# Altium PCB PCB1.pcbdoc
Units mm, origin at the board's own origin, x right, y up, seen from the top; angles counter-clockwise.
Board outline 61.2 x 73.2 mm, 4 copper layers (Top Layer, Inner1, Inner2, Bottom Layer); 32 components, 18 nets, 90 pads, 0 vias.
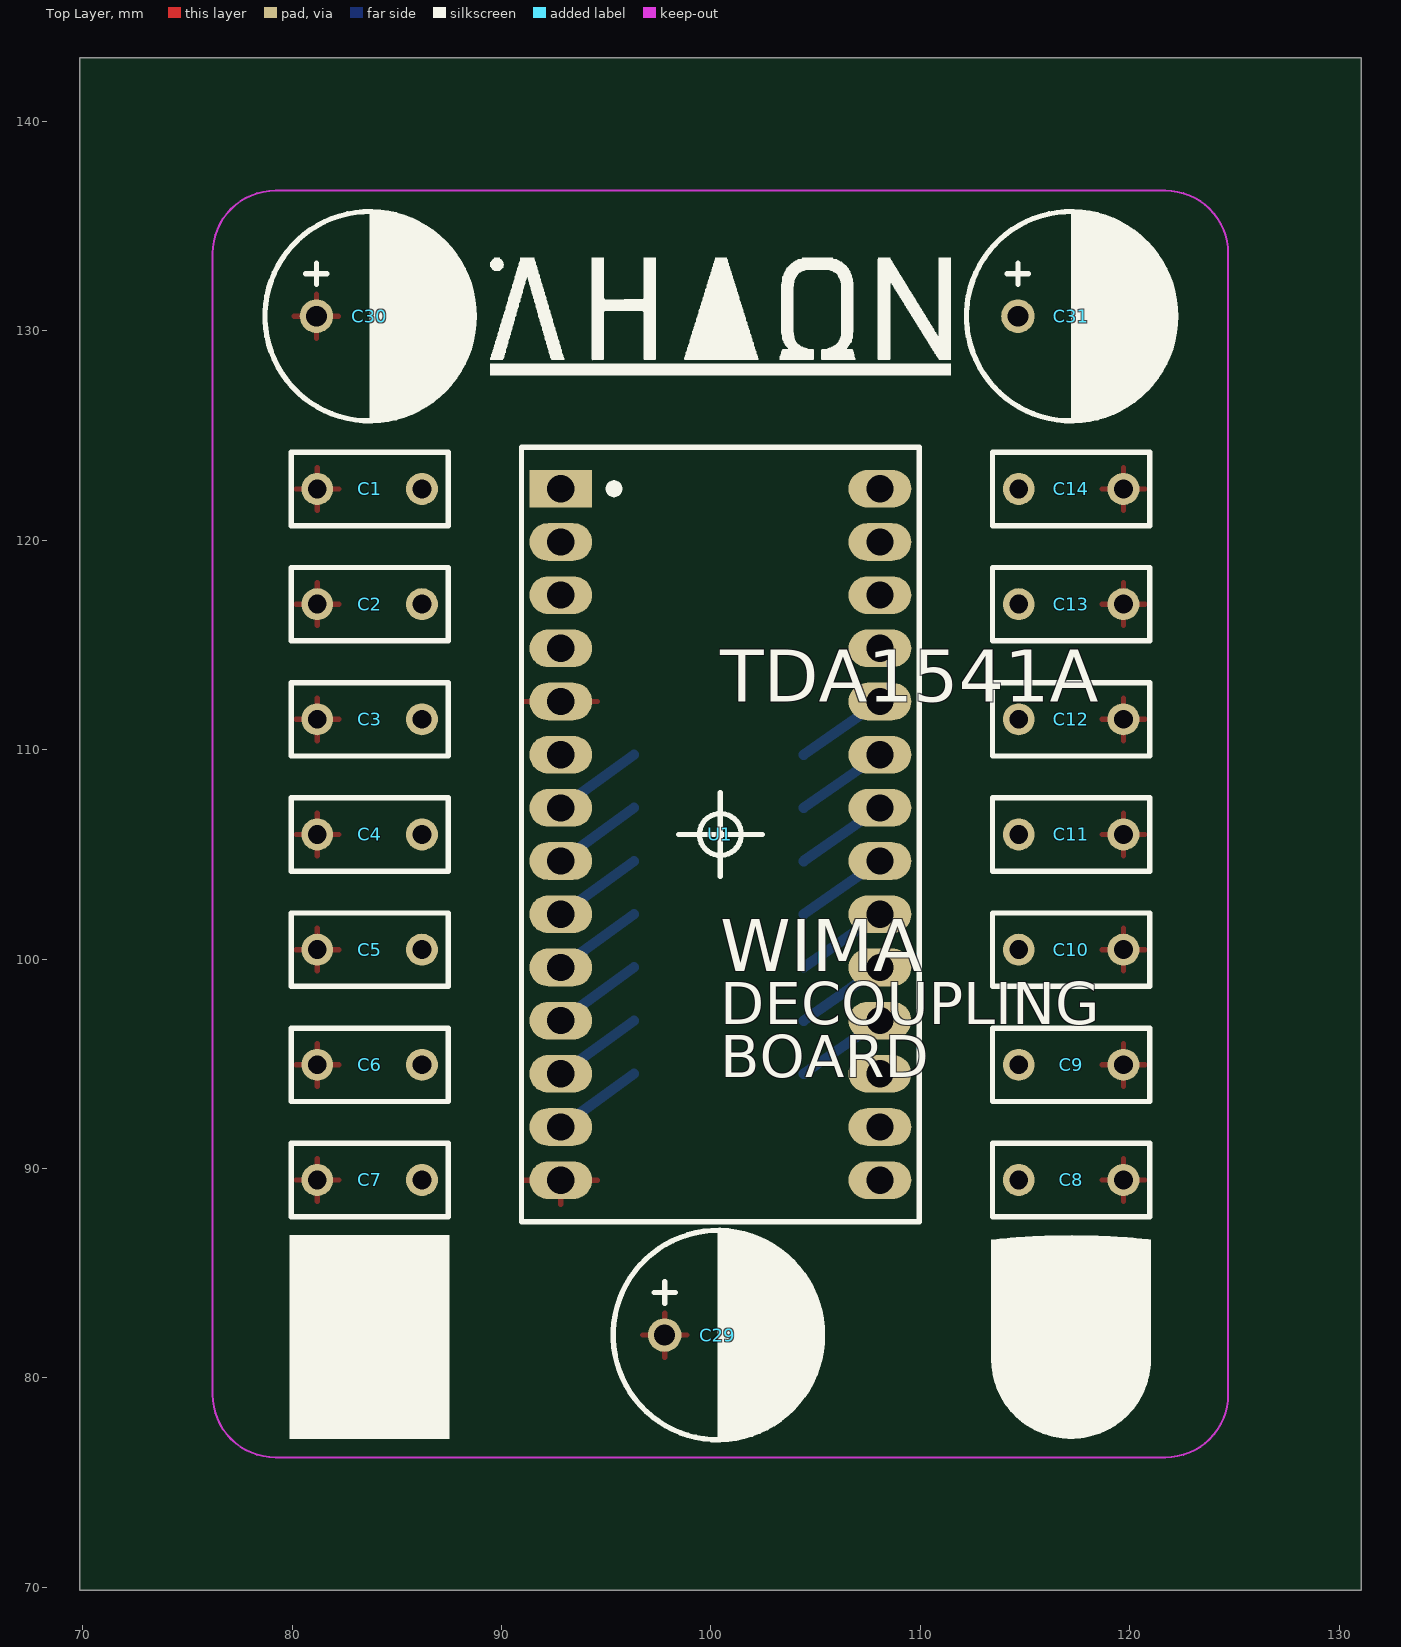
[diagram p0: Top Layer view]
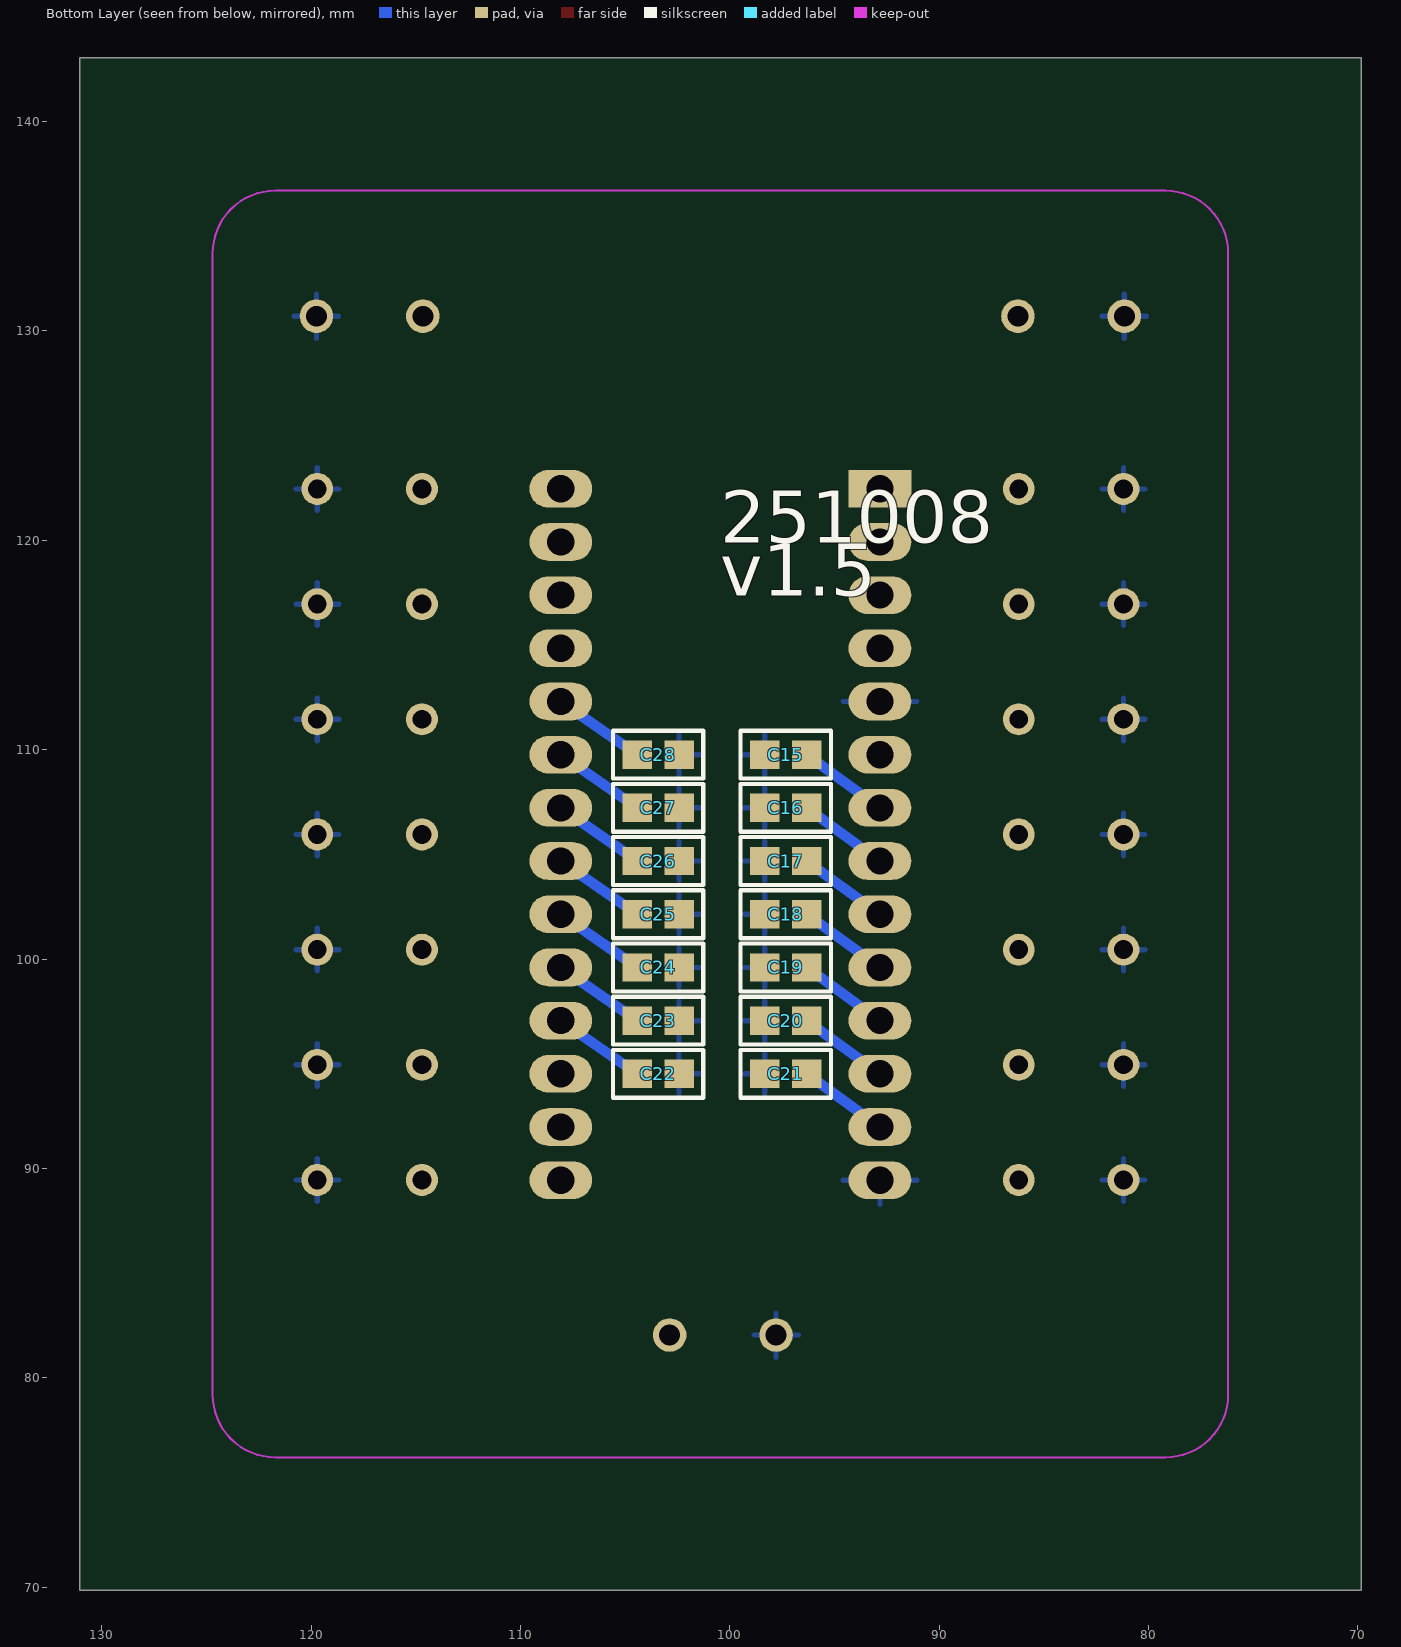
[diagram p1: Bottom Layer view, seen from below]
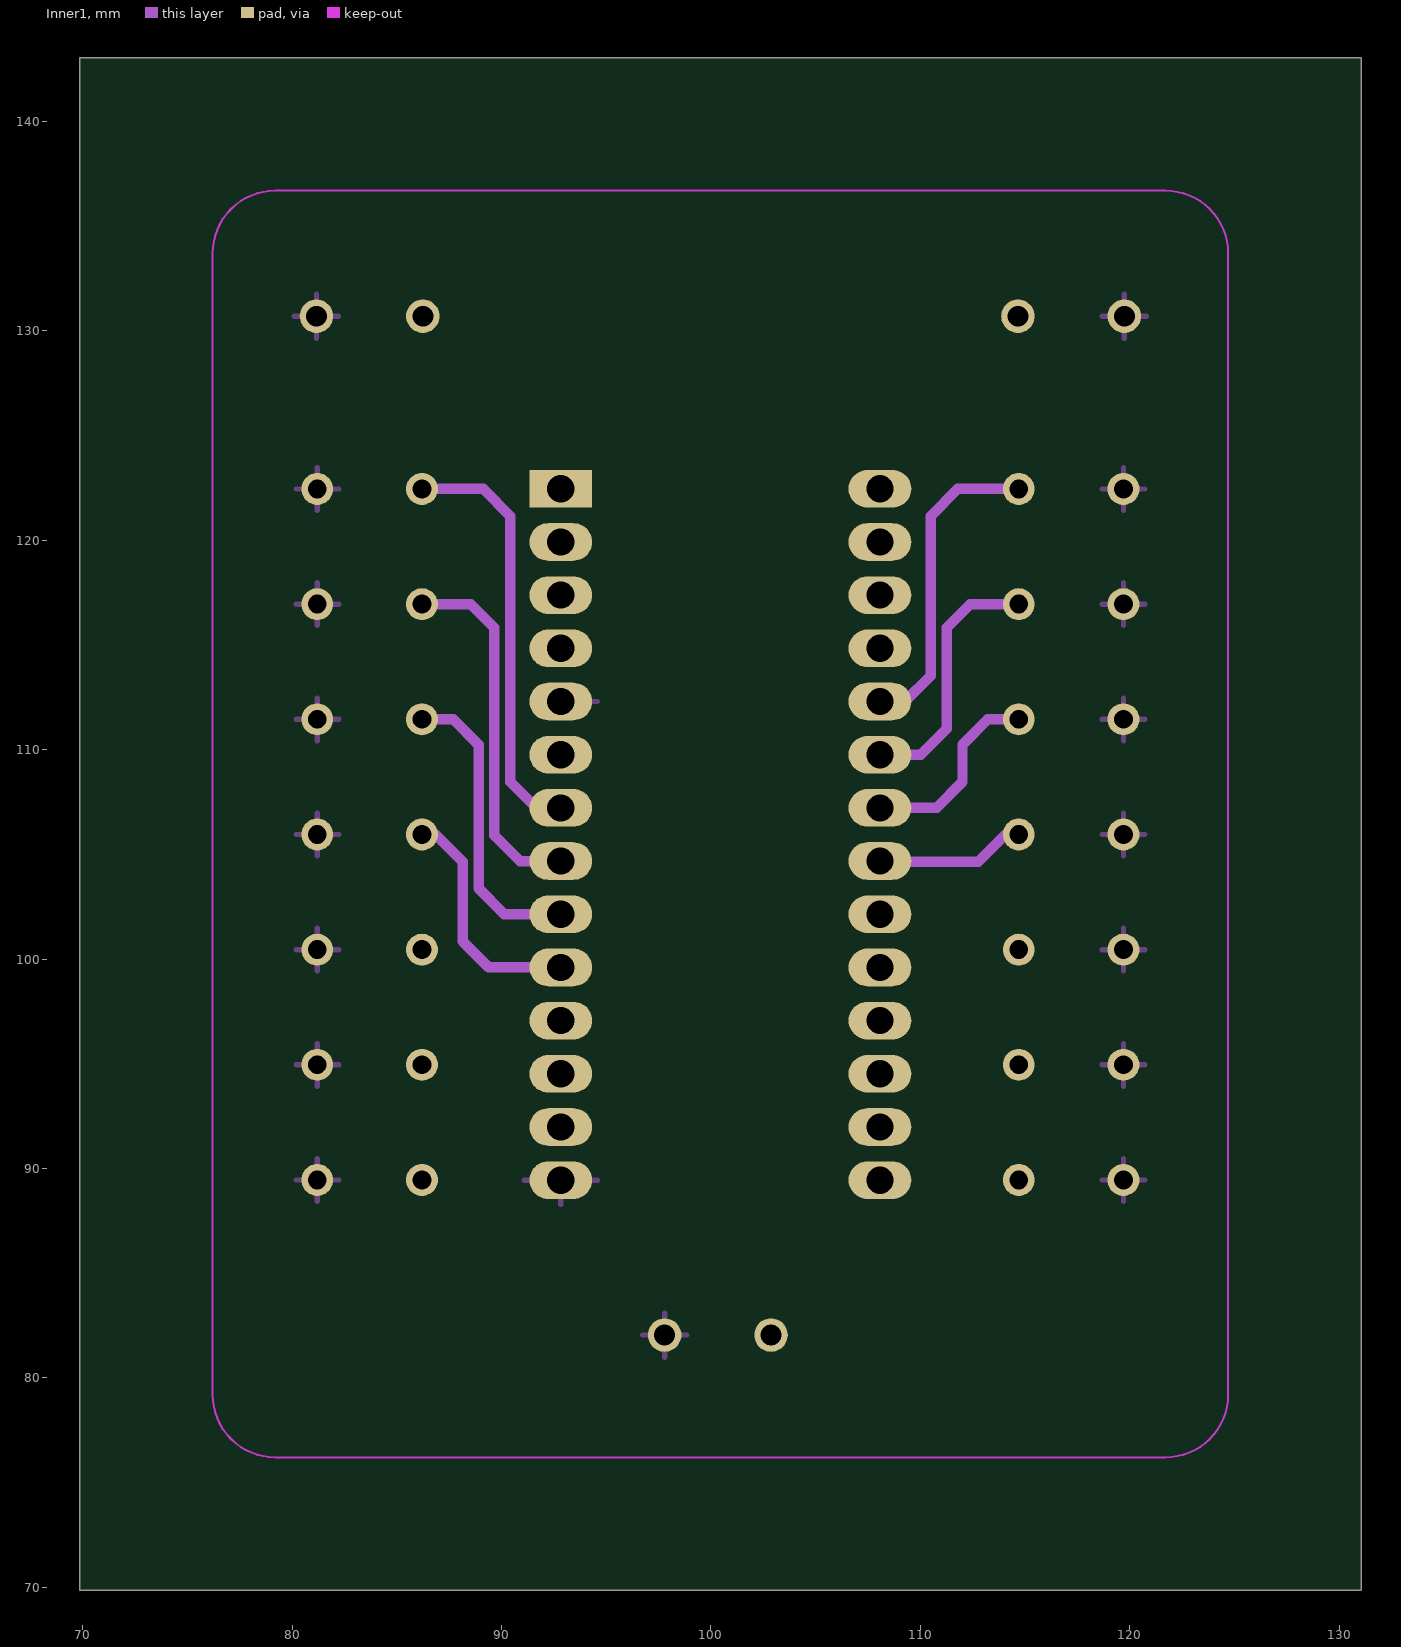
[diagram p2: Inner1]
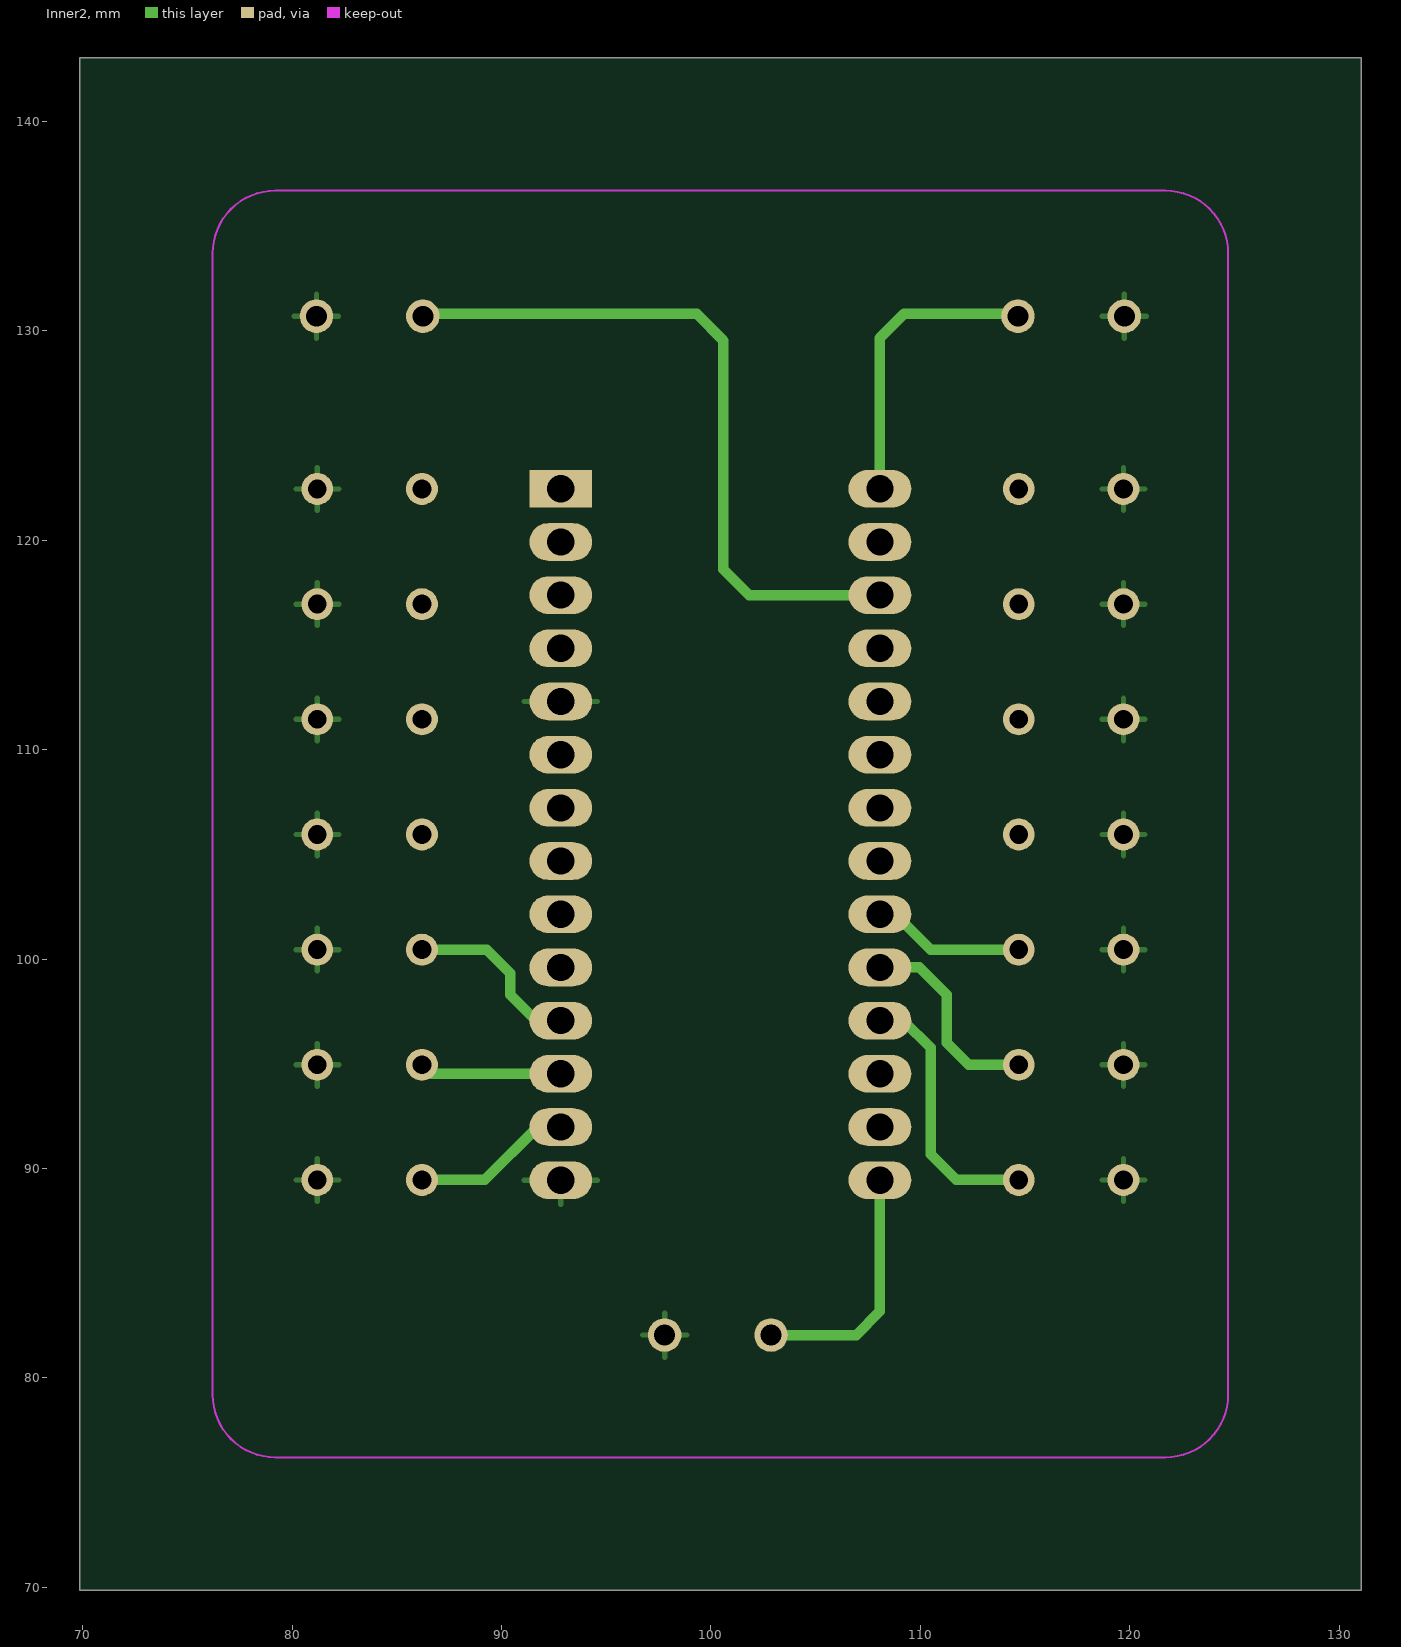
[diagram p3: Inner2]

## Layer stack, top to bottom
Top Layer: signal copper (thickness not stored)
Dielectric: dielectric 0.32, FR-4, Dk 4.8
Inner1: signal copper (thickness not stored)
Dielectric: dielectric 0.32, FR-4, Dk 4.8
Inner2: signal copper (thickness not stored)
Dielectric: dielectric 0.32, FR-4, Dk 4.8
Bottom Layer: signal copper (thickness not stored)

## Board outline
131.05,69.85 69.85,69.85 69.85,143.05 131.05,143.05

## Design rules (kind name [scope] priority, off if disabled: settings)
BoardOutlineClearance copperThickness1oz [All] p0: genericclearance=0.254 ignorepadtopadclearanceinfootprint=FALSE except(0: Arc-SplitContinuation Track-SplitContinuation SMDPad-SplitContinuation THPad-SplitContinuation Via-SplitContinuation Fill-SplitContinuation Poly-SplitContinuation Region-SplitContinuation Text-SplitContinuation; 0.152: SMDPad-CutoutEdge THPad-CutoutEdge Via-CutoutEdge Fill-CutoutEdge Region-CutoutEdge; 0.3: Track-OutlineEdge SMDPad-OutlineEdge THPad-OutlineEdge Via-OutlineEdge Fill-OutlineEdge Region-OutlineEdge Poly-OutlineEdge Text-OutlineEdge Track-CutoutEdge)
BoardOutlineClearance copperThickness2oz [All] p0: genericclearance=0.254 ignorepadtopadclearanceinfootprint=FALSE except(0: Arc-SplitContinuation Track-SplitContinuation SMDPad-SplitContinuation THPad-SplitContinuation Via-SplitContinuation Fill-SplitContinuation Poly-SplitContinuation Region-SplitContinuation Text-SplitContinuation; 0.152: SMDPad-CutoutEdge THPad-CutoutEdge Via-CutoutEdge Fill-CutoutEdge Region-CutoutEdge; 0.3: Track-OutlineEdge SMDPad-OutlineEdge THPad-OutlineEdge Via-OutlineEdge Fill-OutlineEdge Region-OutlineEdge Poly-OutlineEdge Text-OutlineEdge Track-CutoutEdge)
BoardOutlineClearance copperThicknessInner0.5oz [All] p0: genericclearance=0.254 ignorepadtopadclearanceinfootprint=FALSE except(0: Arc-SplitContinuation Track-SplitContinuation SMDPad-SplitContinuation THPad-SplitContinuation Via-SplitContinuation Fill-SplitContinuation Poly-SplitContinuation Region-SplitContinuation Text-SplitContinuation; 0.152: SMDPad-CutoutEdge THPad-CutoutEdge Via-CutoutEdge Fill-CutoutEdge Region-CutoutEdge; 0.3: Track-OutlineEdge SMDPad-OutlineEdge THPad-OutlineEdge Via-OutlineEdge Fill-OutlineEdge Region-OutlineEdge Poly-OutlineEdge Text-OutlineEdge Track-CutoutEdge)
Clearance copperThickness1oz [(InNet('GND') OR InNet('$1N3521') OR InNet('$1N3515') OR InNet('$1N3509') OR InNet('$1N3503') OR InNet('$1N3497') OR InNet('$1N3491') OR InNet('$1N3486') OR InNet('$1N3527') OR InNet('$1N3533') OR InNet('$1N3539') OR InNet('$1N3545') OR InNet('$1N3551') OR InNet('$1N3557') OR InNet('$1N3563') OR InNet('$1N10314') OR InNet('$1N10391') OR InNet('$1N10468'))] p1: gap=0.178 ignorepadtopadclearanceinfootprint=FALSE except(0.102: Track-Track; 0.152: Track-SMDPad SMDPad-SMDPad Track-THPad SMDPad-THPad THPad-THPad Track-Via SMDPad-Via THPad-Via Via-Via Track-Fill SMDPad-Fill THPad-Fill Via-Fill Fill-Fill SMDPad-Region THPad-Region Via-Region Fill-Region Region-Region Track-Poly SMDPad-Poly THPad-Poly Via-Poly Fill-Poly Poly-Poly Track-Text SMDPad-Text THPad-Text Via-Text Fill-Text Region-Text Poly-Text Text-Text; 0.175: Track-Hole SMDPad-Hole THPad-Hole Via-Hole Fill-Hole Region-Hole Poly-Hole Text-Hole Sheet-Hole; 0.3: Track-Region Region-Poly Track-Sheet SMDPad-Sheet THPad-Sheet Via-Sheet Fill-Sheet Region-Sheet Poly-Sheet Text-Sheet)
Clearance copperThickness2oz [All] p1: gap=0.178 ignorepadtopadclearanceinfootprint=FALSE except(0.152: Track-SMDPad SMDPad-SMDPad Track-THPad SMDPad-THPad THPad-THPad Track-Via SMDPad-Via THPad-Via Via-Via Track-Fill SMDPad-Fill THPad-Fill Via-Fill Fill-Fill SMDPad-Region THPad-Region Via-Region Fill-Region Region-Region Track-Poly SMDPad-Poly THPad-Poly Via-Poly Fill-Poly Poly-Poly Track-Text SMDPad-Text THPad-Text Via-Text Fill-Text Region-Text Poly-Text Text-Text; 0.175: Track-Hole SMDPad-Hole THPad-Hole Via-Hole Fill-Hole Region-Hole Poly-Hole Text-Hole Sheet-Hole; 0.203: Track-Track; 0.3: Track-Region Region-Poly Track-Sheet SMDPad-Sheet THPad-Sheet Via-Sheet Fill-Sheet Region-Sheet Poly-Sheet Text-Sheet)
Clearance copperThicknessInner0.5oz [All] p1: gap=0.178 ignorepadtopadclearanceinfootprint=FALSE except(0.089: Track-Track; 0.152: Track-SMDPad SMDPad-SMDPad Track-THPad SMDPad-THPad THPad-THPad Track-Via SMDPad-Via THPad-Via Via-Via Track-Fill SMDPad-Fill THPad-Fill Via-Fill Fill-Fill SMDPad-Region THPad-Region Via-Region Fill-Region Region-Region Track-Poly SMDPad-Poly THPad-Poly Via-Poly Fill-Poly Poly-Poly Track-Text SMDPad-Text THPad-Text Via-Text Fill-Text Region-Text Poly-Text Text-Text; 0.175: Track-Hole SMDPad-Hole THPad-Hole Via-Hole Fill-Hole Region-Hole Poly-Hole Text-Hole Sheet-Hole; 0.3: Track-Region Region-Poly Track-Sheet SMDPad-Sheet THPad-Sheet Via-Sheet Fill-Sheet Region-Sheet Poly-Sheet Text-Sheet)
DiffPairsRouting differentialPair [All] p1: maxuncoupledlength=10 minlimit=5.9843 maxlimit=5.9843 mostfreqgap=5.9843 toplayer_minwidth=5 toplayer_prefwidth=10 toplayer_maxwidth=100 bottomlayer_minwidth=5 bottomlayer_prefwidth=10 bottomlayer_maxwidth=100 midlayer1_minwidth=5 midlayer1_prefwidth=10 midlayer1_maxwidth=100 midlayer2_minwidth=5 midlayer2_prefwidth=10 midlayer2_maxwidth=100
PasteMaskExpansion pasteMaskExpansion [All] p1: expansion=0
PlaneConnect innerPlane [All] p1: planeconnectstyle=Relief reliefexpansion=0.508 reliefentries=4 reliefconductorwidth=0.254 reliefairgap=0.254
PolygonConnect copperRegion [All] p1: connectstyle=Relief reliefentries=4 reliefconductorwidth=10 polygonreliefangle="90 Angle" airgapwidth=10
RoutingVias viaSize [All] p1: viastyle="Through Hole" holewidth=12.0078 minholewidth=7.874 maxholewidth=248.0314 width=24.0158 minwidth=11.811 maxwidth=393.7008
SolderMaskExpansion solderMaskExpansion [All] p1: useseparateexpansions=TRUE expansion=2.0079 expansionbottom=2.0079
Width copperThickness1oz [All] p1: maxlimit=100 minlimit=4 preferedwidth=10
Width copperThickness2oz [All] p1: maxlimit=100 minlimit=8 preferedwidth=10
Width copperThickness0.5oz [All] p1: maxlimit=100 minlimit=4 preferedwidth=10

## Components (designator, comment, footprint, x,y, rotation, side; value= is the part's Value field where it differs from the comment)
C1 "MKS2C034701C00KSSD" CAP-TH_L7.2-W3.5-P5.00-D0.5 83.7,122.45 r0 top
C2 "MKS2C034701C00KSSD" CAP-TH_L7.2-W3.5-P5.00-D0.5 83.7,116.95 r0 top
C3 "MKS2C034701C00KSSD" CAP-TH_L7.2-W3.5-P5.00-D0.5 83.7,111.45 r0 top
C4 "MKS2C034701C00KSSD" CAP-TH_L7.2-W3.5-P5.00-D0.5 83.7,105.95 r0 top
C5 "MKS2C034701C00KSSD" CAP-TH_L7.2-W3.5-P5.00-D0.5 83.7,100.45 r0 top
C6 "MKS2C034701C00KSSD" CAP-TH_L7.2-W3.5-P5.00-D0.5 83.7,94.95 r0 top
C7 "MKS2C034701C00KSSD" CAP-TH_L7.2-W3.5-P5.00-D0.5 83.7,89.45 r0 top
C8 "MKS2C034701C00KSSD" CAP-TH_L7.2-W3.5-P5.00-D0.5 117.2,89.45 r180 top
C9 "MKS2C034701C00KSSD" CAP-TH_L7.2-W3.5-P5.00-D0.5 117.2,94.95 r180 top
C10 "MKS2C034701C00KSSD" CAP-TH_L7.2-W3.5-P5.00-D0.5 117.2,100.45 r180 top
C11 "MKS2C034701C00KSSD" CAP-TH_L7.2-W3.5-P5.00-D0.5 117.2,105.95 r180 top
C12 "MKS2C034701C00KSSD" CAP-TH_L7.2-W3.5-P5.00-D0.5 117.2,111.45 r180 top
C13 "MKS2C034701C00KSSD" CAP-TH_L7.2-W3.5-P5.00-D0.5 117.2,116.95 r180 top
C14 "MKS2C034701C00KSSD" CAP-TH_L7.2-W3.5-P5.00-D0.5 117.2,122.45 r180 top
C15 "CGA4J2X7R2A104KT0Y0U" C0805 97.326,109.76 r0 bottom
C16 "CGA4J2X7R2A104KT0Y0U" C0805 97.326,107.22 r0 bottom
C17 "CGA4J2X7R2A104KT0Y0U" C0805 97.326,104.68 r0 bottom
C18 "CGA4J2X7R2A104KT0Y0U" C0805 97.326,102.14 r0 bottom
C19 "CGA4J2X7R2A104KT0Y0U" C0805 97.326,99.6 r0 bottom
C20 "CGA4J2X7R2A104KT0Y0U" C0805 97.326,97.06 r0 bottom
C21 "CGA4J2X7R2A104KT0Y0U" C0805 97.326,94.52 r0 bottom
C22 "CGA4J2X7R2A104KT0Y0U" C0805 103.422,94.52 r180 bottom
C23 "CGA4J2X7R2A104KT0Y0U" C0805 103.422,97.06 r180 bottom
C24 "CGA4J2X7R2A104KT0Y0U" C0805 103.422,99.6 r180 bottom
C25 "CGA4J2X7R2A104KT0Y0U" C0805 103.422,102.14 r180 bottom
C26 "CGA4J2X7R2A104KT0Y0U" C0805 103.422,104.68 r180 bottom
C27 "CGA4J2X7R2A104KT0Y0U" C0805 103.422,107.22 r180 bottom
C28 "CGA4J2X7R2A104KT0Y0U" C0805 103.422,109.76 r180 bottom
C29 "APSG250ELL331MJB5S" CAP-TH_BD10.0-P5.00-D1.0-FD 100.33,82.042 r0 top
C30 "APSG250ELL331MJB5S" CAP-TH_BD10.0-P5.00-D1.0-FD 83.7,130.7 r0 top
C31 "APSG250ELL331MJB5S" CAP-TH_BD10.0-P5.00-D1.0-FD 117.2,130.7 r0 top
U1 "116-83-628-41-006101" 116-83-628-41-006101 100.45,105.95 r270 top

## Footprints (in the part's own frame and the unit in brackets; to place one, negate y for a bottom-side part, rotate by r counter-clockwise, add the part's x,y. Pads: shape width x height; smd on the part's side, far side on the other; paste and mask are expansions set on the pad)
116-83-628-41-006101 [mm]
  rect 1.8x3 hole 1.3: 1(-16.51,-7.62)
  oval 1.8x3 hole 1.3: 2(-13.97,-7.62) 3(-11.43,-7.62) 4(-8.89,-7.62) 5(-6.35,-7.62) 6(-3.81,-7.62) 7(-1.27,-7.62) 8(1.27,-7.62) 9(3.81,-7.62) 10(6.35,-7.62) 11(8.89,-7.62) 12(11.43,-7.62) 13(13.97,-7.62) 14(16.51,-7.62) 15(16.51,7.62) 16(13.97,7.62) 17(11.43,7.62) 18(8.89,7.62) 19(6.35,7.62) 20(3.81,7.62) 21(1.27,7.62) 22(-1.27,7.62) 23(-3.81,7.62) 24(-6.35,7.62) 25(-8.89,7.62) 26(-11.43,7.62) 27(-13.97,7.62) 28(-16.51,7.62)
  silkscreen extent -18.5,-9.5 18.5,9.5
C0805 [mm]
  rect 1.41x1.35 smd: 1(-1,0) 2(1,0)
  silkscreen extent -2.16,-1.14 2.16,1.14
CAP-TH_BD10.0-P5.00-D1.0-FD [mm]
  round 1.6 hole 1: 1(-2.54,0) 2(2.54,0)
  silkscreen extent -5,-5 5,5
CAP-TH_L7.2-W3.5-P5.00-D0.5 [mil]
  round 60 hole 35.43: 1(-98.43,0) 2(98.42,0)
  silkscreen extent -148,-69 148,69

## Nets (pads, with @x,y where several pads share a name; then routed paths per layer and width w, separated by ;. In a path a pad name is that pad's centre, name@x,y a point inside that pad or via, vN(x,y) a via of type N, cw(c..) or ccw(c..) an arc to the next point about the centre after c; other vN are vias at no path point)
$1N3486: C7.2 C21.1 U1.13 | length 12
  Inner2 w0.5: C7.2 89.196,89.45 91.726,91.98 U1.13
  Bottom Layer w0.5: U1.13 C21.1
$1N3491: C6.2 C20.1 U1.12 | length 11.1
  Inner2 w0.5: C6.2 86.63,94.52 U1.12
  Bottom Layer w0.5: U1.12 C20.1
$1N3497: C5.2 C19.1 U1.11 | length 13
  Inner2 w0.5: C5.2 89.288,100.45 90.424,99.314 90.424,98.298 91.662,97.06 U1.11
  Bottom Layer w0.5: U1.11 C19.1
$1N3503: C4.2 C18.1 U1.10 | length 15.8
  Inner1 w0.5: C4.2 86.836,105.95 88.138,104.648 88.138,100.838 89.376,99.6 U1.10
  Bottom Layer w0.5: U1.10 C18.1
$1N3509: C3.2 C17.1 U1.9 | length 18.8
  Inner1 w0.5: C3.2 87.686,111.45 88.9,110.236 88.9,103.378 90.138,102.14 U1.9
  Bottom Layer w0.5: U1.9 C17.1
$1N3515: C2.2 C16.1 U1.8 | length 21.8
  Inner1 w0.5: C2.2 88.536,116.95 89.662,115.824 89.662,105.918 90.9,104.68 U1.8
  Bottom Layer w0.5: U1.8 C16.1
$1N3521: C1.2 C15.1 U1.7 | length 24.7
  Inner1 w0.5: C1.2 89.132,122.45 90.424,121.158 90.424,108.458 91.662,107.22 U1.7
  Bottom Layer w0.5: U1.7 C15.1
$1N3527: C8.2 C22.1 U1.18 | length 17.2
  Inner2 w0.5: U1.18 109.188,97.06 110.49,95.758 110.49,90.678 111.718,89.45 C8.2@114.7,89.45
  Bottom Layer w0.5: C22.1 U1.18
$1N3533: C9.2 C23.1 U1.19 | length 14.3
  Inner2 w0.5: U1.19 109.95,99.6 111.252,98.298 111.252,96.012 112.314,94.95 C9.2@114.7,94.95
  Bottom Layer w0.5: C23.1 U1.19
$1N3539: C10.2 C24.1 U1.20 | length 11.8
  Inner2 w0.5: U1.20 108.8,102.14 110.49,100.45 C10.2@114.7,100.45
  Bottom Layer w0.5: C24.1 U1.20
$1N3545: C11.2 C25.1 U1.21 | length 11.6
  Inner1 w0.5: U1.21 108.102,104.648 112.776,104.648 114.078,105.95 C11.2@114.7,105.95
  Bottom Layer w0.5: C25.1 U1.21
$1N3551: C12.2 C26.1 U1.22 | length 13.9
  Inner1 w0.5: U1.22 110.776,107.22 112.014,108.458 112.014,110.236 113.228,111.45 C12.2@114.7,111.45
  Bottom Layer w0.5: C26.1 U1.22
$1N3557: C13.2 C27.1 U1.23 | length 16.9
  Inner1 w0.5: U1.23 110.014,109.76 111.252,110.998 111.252,115.824 112.378,116.95 C13.2@114.7,116.95
  Bottom Layer w0.5: C27.1 U1.23
$1N3563: C14.2 C28.1 U1.24 | length 19.7
  Inner1 w0.5: U1.24 109.252,112.3 110.49,113.538 110.49,121.158 111.782,122.45 C14.2@114.7,122.45
  Bottom Layer w0.5: C28.1 U1.24
$1N10314: C29.2 U1.15 | length 11.9
  Inner2 w0.5: C29.2 106.934,82.042 108.07,83.178 U1.15
$1N10391: C30.2 U1.26 | length 33.8
  Inner2 w0.5: C30.2 86.35,130.81 99.314,130.81 100.584,129.54 100.584,118.618 101.822,117.38 U1.26
$1N10468: C31.1 U1.28 | length 14.3
  Inner2 w0.5: U1.28 108.07,129.66 109.22,130.81 114.55,130.81 C31.1
GND: C1.1 C2.1 C3.1 C4.1 C5.1 C6.1 C7.1 C8.1 C9.1 C10.1 C11.1 C12.1 C13.1 C14.1 C15.2 C16.2 C17.2 C18.2 C19.2 C20.2 C21.2 C22.2 C23.2 C24.2 C25.2 C26.2 C27.2 C28.2 C29.1 C30.1 C31.2 U1.5 U1.14
pads on no net: U1.1 U1.2 U1.3 U1.4 U1.6 U1.16 U1.17 U1.25 U1.27

## Polygon pours and split planes (outlines as drawn)
GND on Bottom Layer (solid, remove dead copper, pour order 2): 121.7,76.7 79.2,76.7 cw(c79.2,79.2) 76.7,79.2 76.7,133.7 cw(c79.2,133.7) 79.2,136.2 121.7,136.2 cw(c121.7,133.7) 124.2,133.7 124.2,79.2 cw(c121.7,79.2)
GND on Top Layer (solid, remove dead copper, pour order 0): 121.7,76.7 79.2,76.7 cw(c79.2,79.2) 76.7,79.2 76.7,133.7 cw(c79.2,133.7) 79.2,136.2 121.7,136.2 cw(c121.7,133.7) 124.2,133.7 124.2,79.2 cw(c121.7,79.2)
GND on Inner1 (solid, remove dead copper): 121.7,76.7 79.2,76.7 cw(c79.2,79.2) 76.7,79.2 76.7,133.7 cw(c79.2,133.7) 79.2,136.2 121.7,136.2 cw(c121.7,133.7) 124.2,133.7 124.2,79.2 cw(c121.7,79.2)
GND on Inner2 (solid, remove dead copper): 121.7,76.7 79.2,76.7 cw(c79.2,79.2) 76.7,79.2 76.7,133.7 cw(c79.2,133.7) 79.2,136.2 121.7,136.2 cw(c121.7,133.7) 124.2,133.7 124.2,79.2 cw(c121.7,79.2)

## Keep-outs
Board Outline Layer:
  lines w0.1: 76.2,79.2 ccw(c79.2,79.2) 79.2,76.2 121.7,76.2 ccw(c121.7,79.2) 124.7,79.2 124.7,133.7 ccw(c121.7,133.7) 121.7,136.7 79.2,136.7 ccw(c79.2,133.7) 76.2,133.7 76.2,79.2

## Silkscreen, mask and mechanical layers (free items; w line width, h text height)
Top Silkscreen Layer:
  drawing of 26 lines, arcs and shapes, not listed
  text "TDA1541A" at 100.45,112.3 h2.5
  text "WIMA" at 100.45,99.424 h2.5
  text "DECOUPLING" at 100.45,96.884 h2
  text "BOARD" at 100.45,94.344 h2
Bottom Silkscreen Layer:
  text "251008" at 100.45,119.89 h2.5
  text "v1.5" at 100.45,117.347 h2.5